# Altium PCB 2.0_X0.PcbDoc (part 1 of 2)
Units mm, origin at the board's own origin, x right, y up, seen from the top; angles counter-clockwise.
Board outline 35 x 45.39 mm, 4 copper layers (Top, Route2, Route15, Bottom), stack 1.64 mm thick; 99 components, 106 nets, 391 pads, 199 vias.
Unrouted connection lines stored in the file: 53.
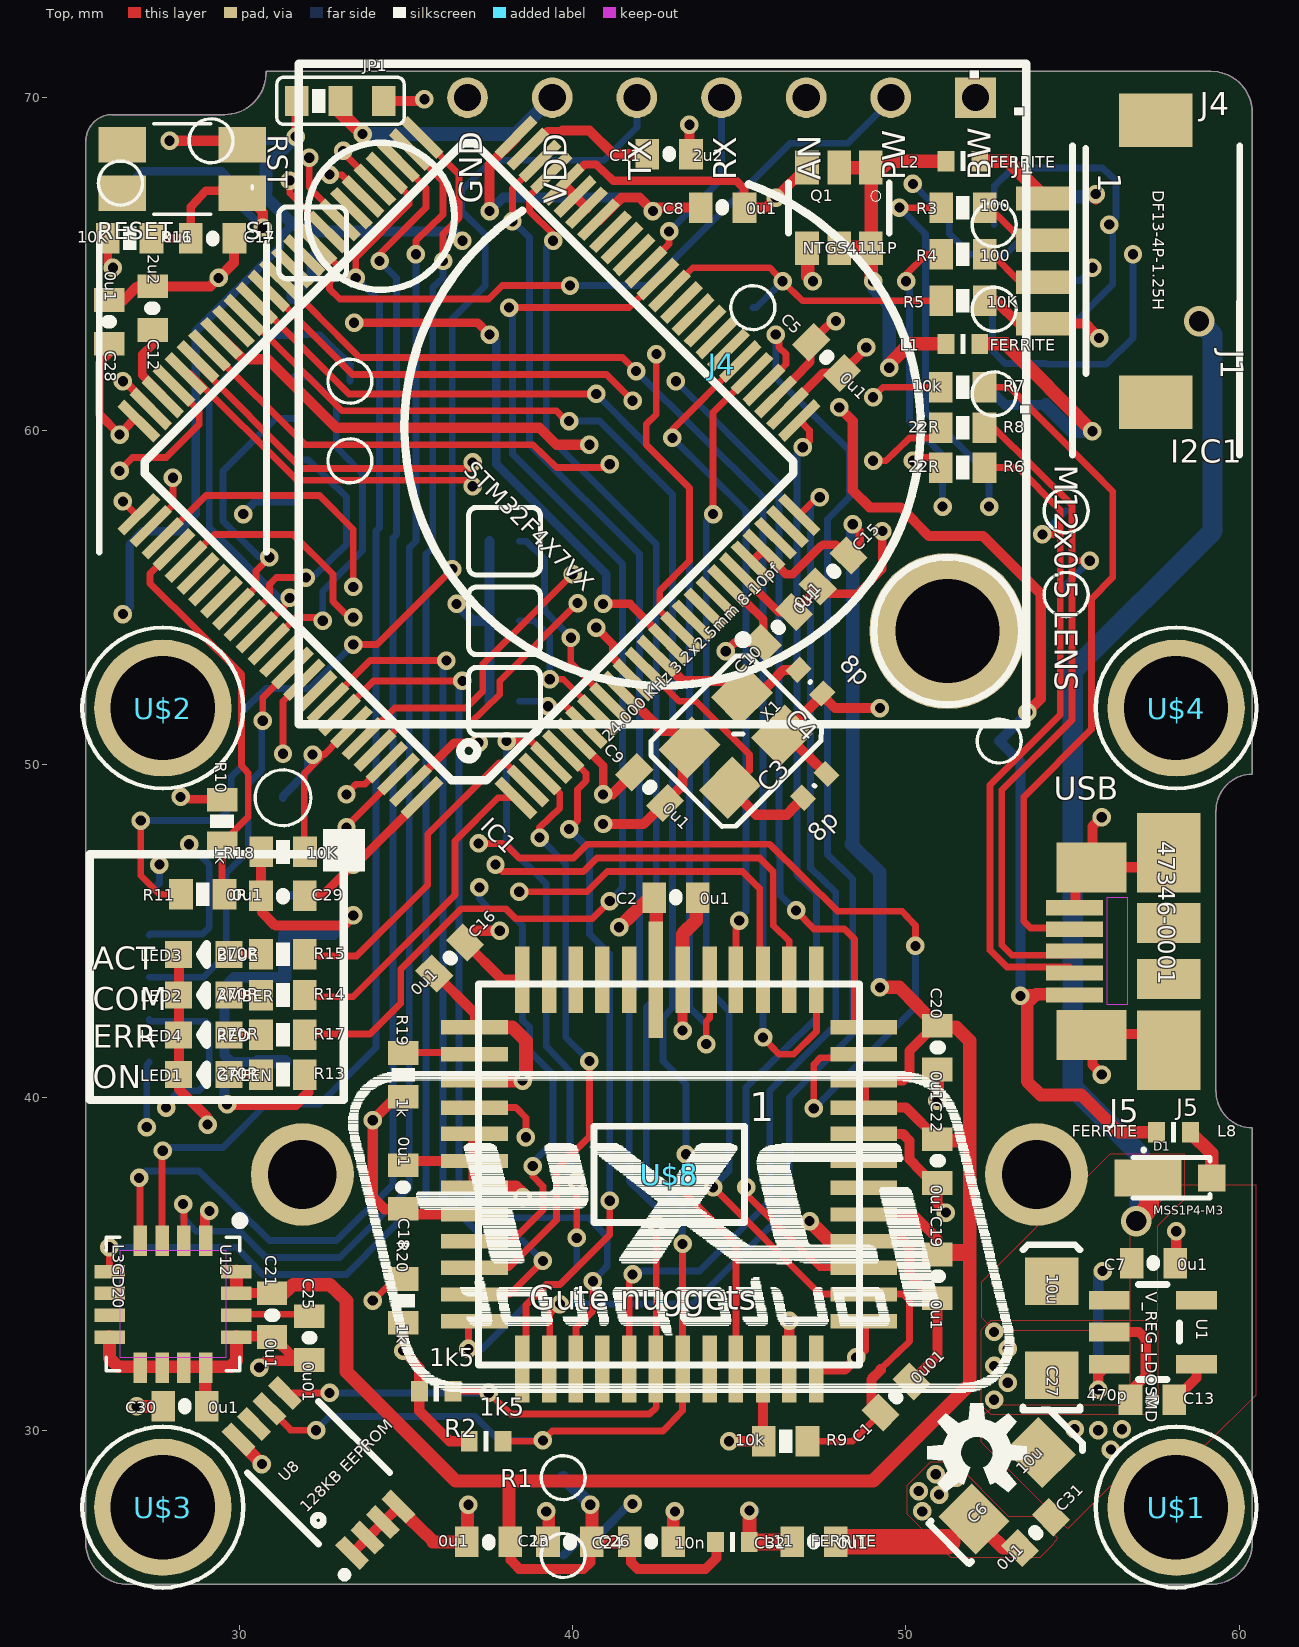
[diagram p0: Top view]
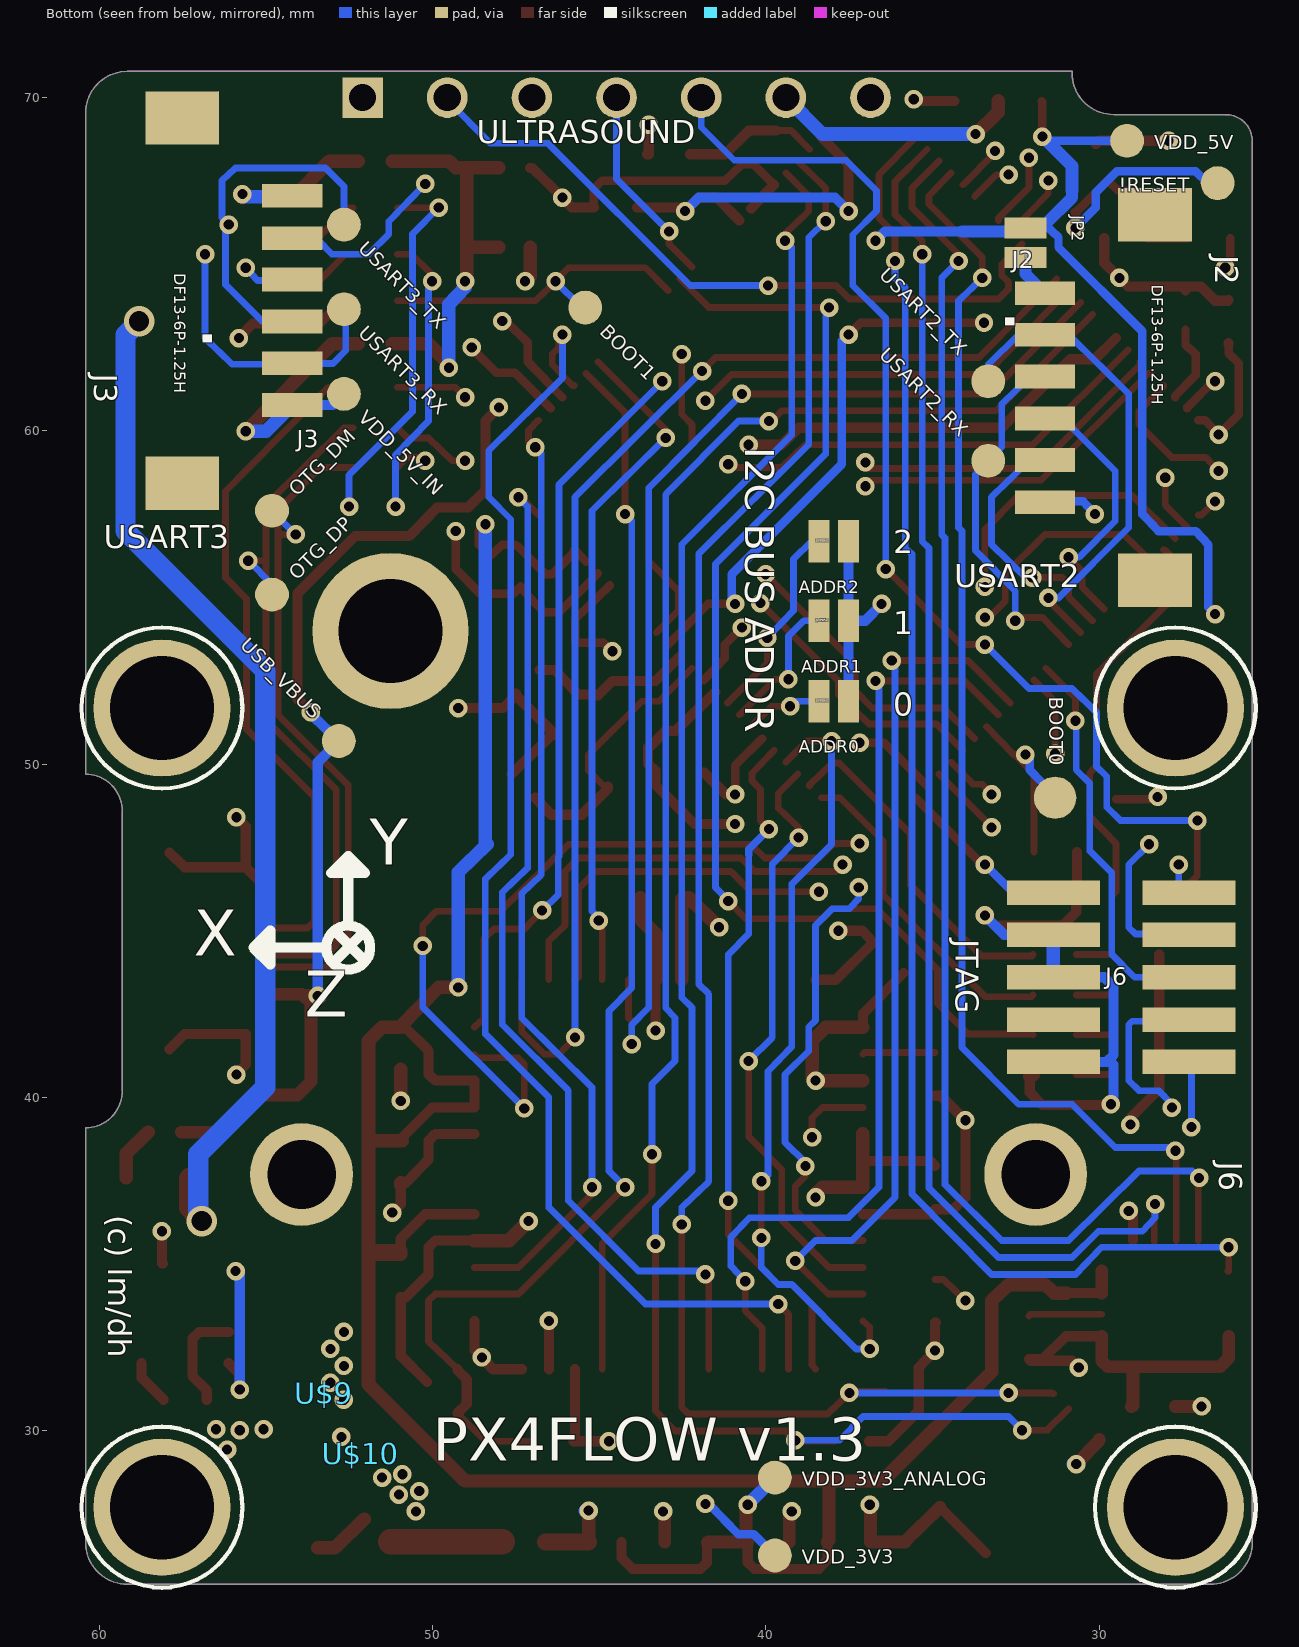
[diagram p1: Bottom view, seen from below]
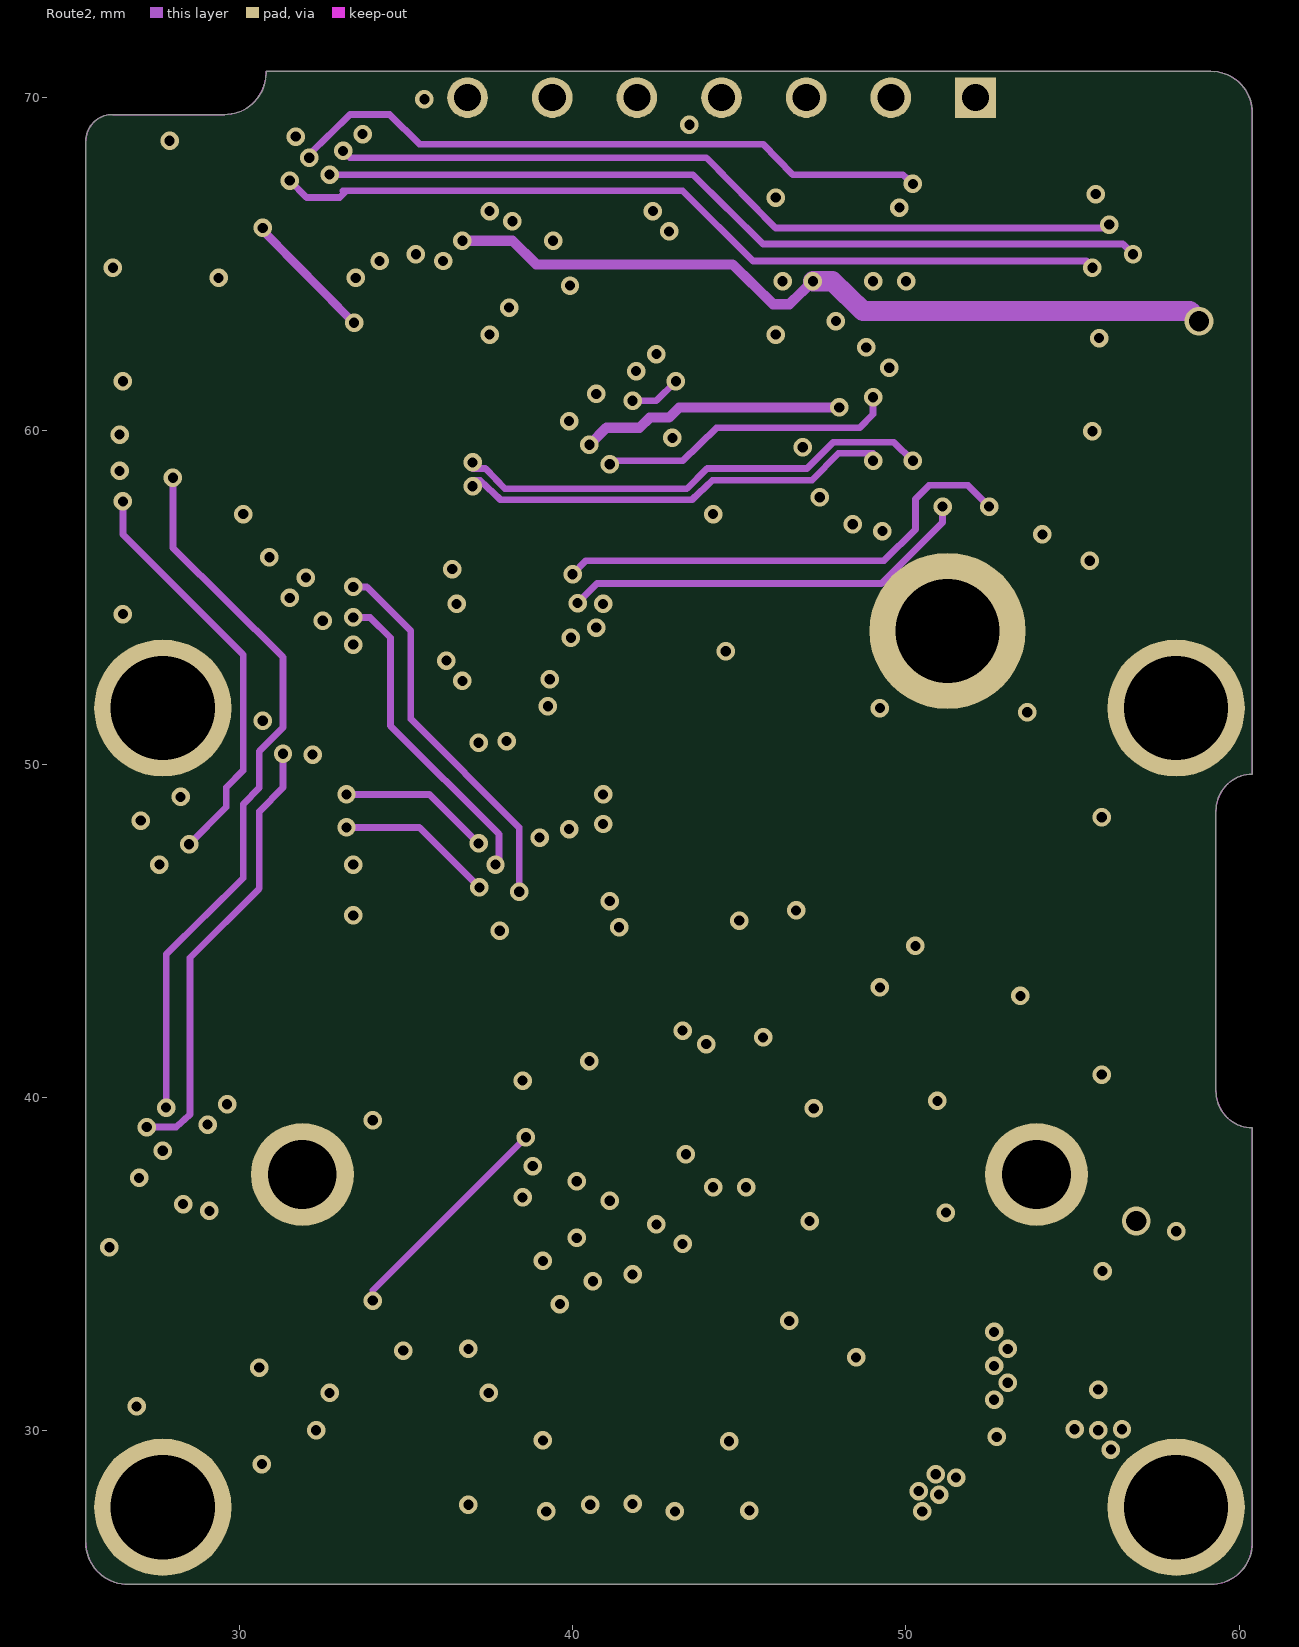
[diagram p2: Route2]
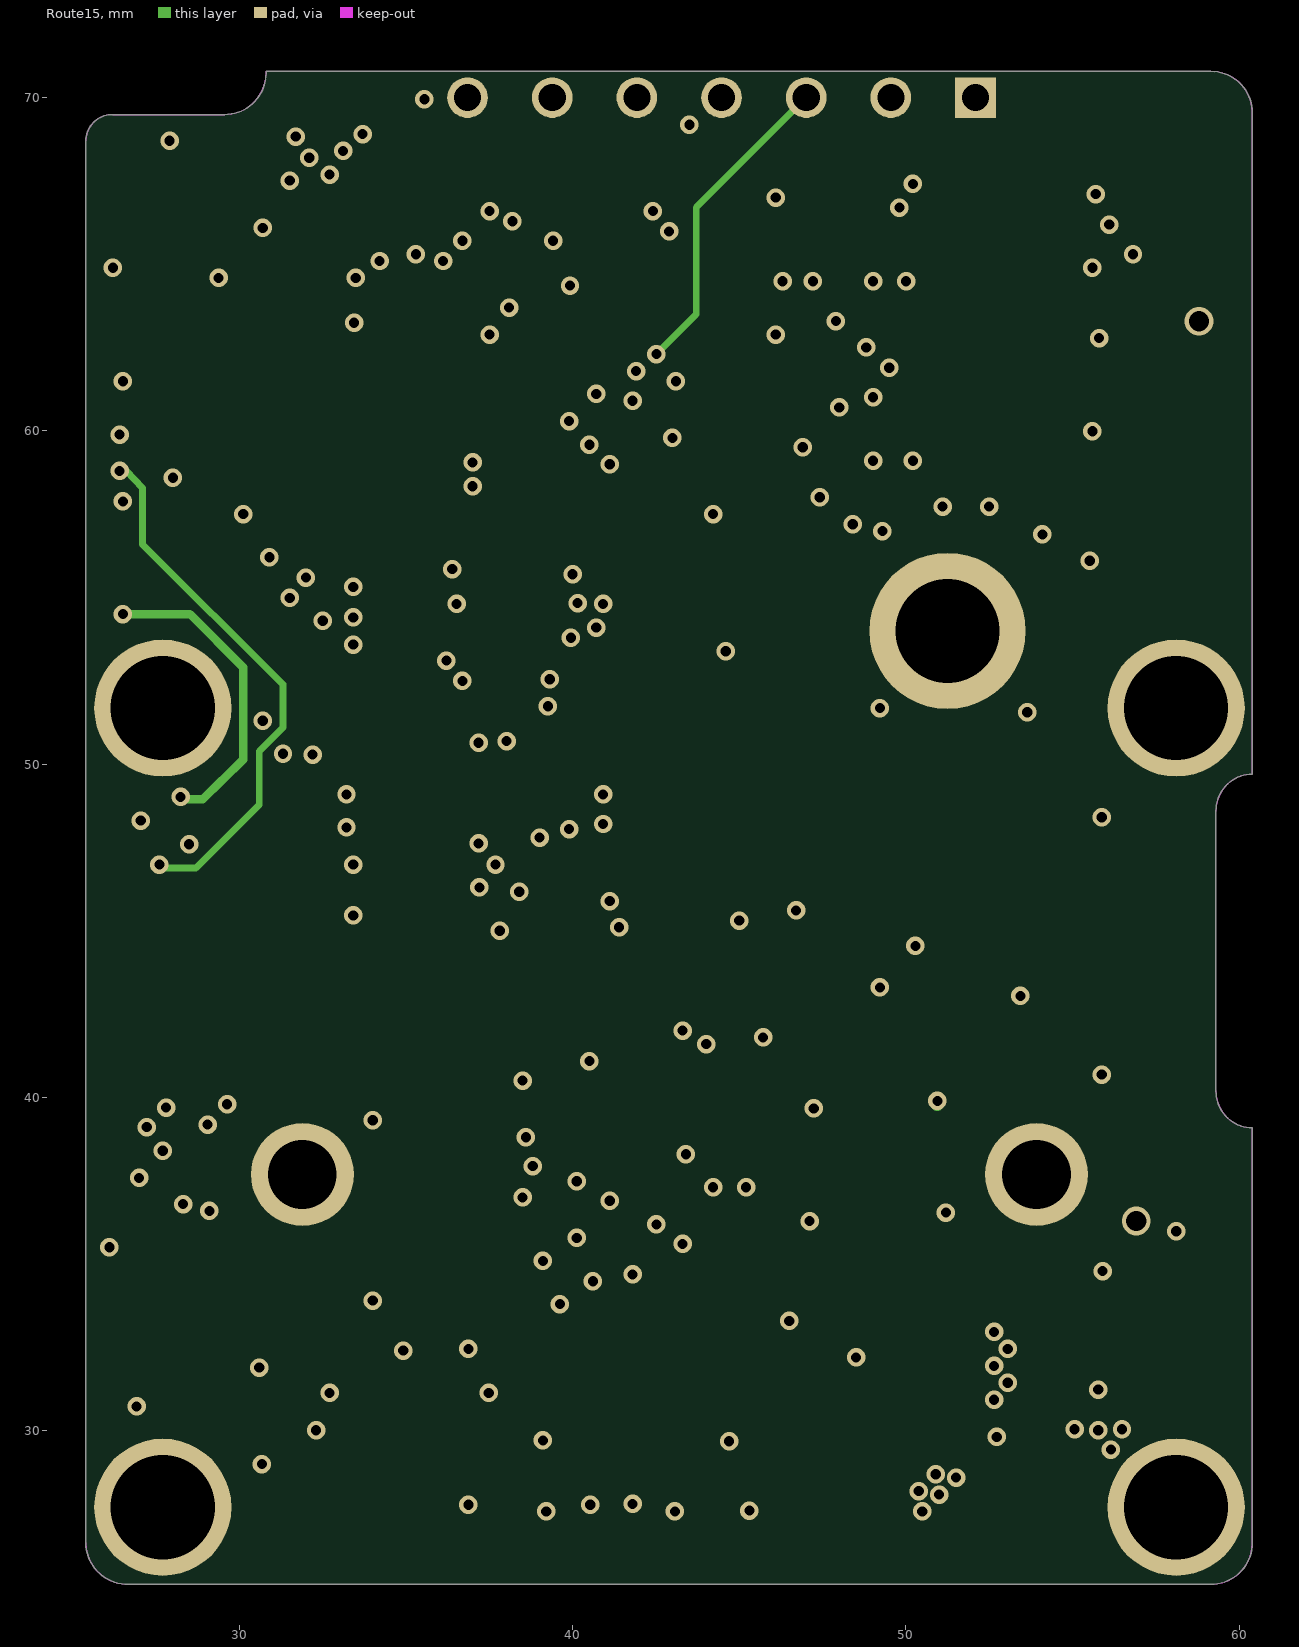
[diagram p3: Route15]

## Layer stack, top to bottom
Top Solder: solder mask 0.0102, Solder Resist, Dk 3.5
Top: signal copper 0.035
Dielectric 1: core 0.5, FR-4, Dk 4.8
Route2: signal copper 0.035
Dielectric 2: core 0.5, FR-4, Dk 4.8
Route15: signal copper 0.035
Dielectric 3: core 0.5, FR-4, Dk 4.8
Bottom: signal copper 0.035
Bottom Solder: solder mask 0.0102, Solder Resist, Dk 3.5

## Board outline
25.4,26.645 25.4,68.707 cw(c26.2,68.694) 26.213,69.494 29.566,69.494 ccw(c29.566,70.739) 30.81,70.739 30.81,70.79 59.157,70.79 cw(c59.157,69.545) 60.401,69.545 60.401,49.708 ccw(c60.414,48.603) 59.309,48.59 59.309,40.208 ccw(c60.414,40.195) 60.401,39.091 60.401,26.645 cw(c59.157,26.645) 59.157,25.4 26.67,25.4 cw(c26.657,26.657)

## Design rules (kind name [scope] priority, off if disabled: settings)
Clearance [All] p1: gap=0.15 except(0: SMDPad-SMDPad SMDPad-THPad SMDPad-Via)
Clearance "Clearance (Same Net)" [All] p2: gap=0 except(0.15: SMDPad-SMDPad SMDPad-THPad SMDPad-Via)
HoleSize HoleSize_1 [All] p1: absolutevalues=TRUE maxlimit=2540 minlimit=0.3 maxpercent=80.000 minpercent=20.000
HoleSize [All] p2: absolutevalues=TRUE maxlimit=2.54 minlimit=0.025 maxpercent=80.000 minpercent=20.000
HoleToHoleClearance mdViaViaSameLayer [All] p1: gap=0.203 allowstackedmicrovias=TRUE
HoleToHoleClearance [All] p2: gap=0.254 allowstackedmicrovias=TRUE
PasteMaskExpansion mlMinCreamFrame [All] p1: expansion=-0.102
PasteMaskExpansion [All] p2: expansion=0
PolygonConnect ThermalVias [IsVia] p1: connectstyle=Direct reliefconductorwidth=0.254 reliefentries=4 polygonreliefangle="90 Angle" airgapwidth=0.254
PolygonConnect [All] p2: connectstyle=Relief reliefconductorwidth=0.254 reliefentries=4 polygonreliefangle="90 Angle" airgapwidth=0.254
RoutingVias [All] p1: holewidth=0.711 width=1.27 viastyle="Through Hole" minholewidth=0.711 minwidth=1.27 maxholewidth=0.711 maxwidth=1.27
SilkToSilkClearance [All] p1 off: silktosilkclearance=0.254
SilkToSolderMaskClearance [IsPad] p1 off: minsilkscreentomaskgap=0.254 clearancetoexposedcopper=TRUE
SolderMaskExpansion mlMinStopFrame [All] p1: expansion=0.025
SolderMaskExpansion [All] p2: expansion=0.102
Width Width_1 [All] p1: maxlimit=2540 minlimit=0.15 preferedwidth=0.254
Width [All] p2: maxlimit=0.254 minlimit=0.254 preferedwidth=0.254
25 further rules are at their usual default settings.

## Components (designator, comment, footprint, x,y, rotation, side; value= is the part's Value field where it differs from the comment)
!RESET "" PAD.04X.04 26.441,67.437 r359.99 bottom
ADDR0 "JUMPER-2" SJ_2 38.405,51.892 r359.99 bottom
ADDR1 "JUMPER-2" SJ_2 38.405,54.305 r359.99 bottom
ADDR2 "JUMPER-2" SJ_2 38.405,56.693 r359.99 bottom
BOOT0 "" PAD.05X.05 31.318,48.997 r89.98 bottom
BOOT1 "" PAD.04X.04 45.415,63.703 r224.99 bottom
C1 "0u01" 0402-CAP#1 49.708,31.013 r45.01 top
C2 "0u1" 0402-CAP#1 43.104,45.999 r0 top
C3 "8p" 0402-CAP#2 47.269,49.352 r45.01 top
C4 "8p" 0402-CAP#2 47.142,52.476 r135 top
C5 "0u1" 0402-CAP#1 47.625,62.205 r315.01 top
C6 "10u" EIA3216 53.035,28.346 r45.01 top
C7 "0u1" 0402-CAP#1 57.429,35.027 r0 top
C8 "0u1" 0402-CAP#1 44.501,66.7 r0 top
C9 "0u1" 0402-CAP#1 42.316,49.301 r315.01 top
C10 "0u1" 0402-CAP#1 46.177,54.102 r45.01 top
C11 "2u2" 0402-CAP#1 42.901,68.301 r0 top
C12 "2u2" 0402-CAP#1 27.407,63.678 r90.02 top
C13 "470p" 0402-CAP#1 57.404,30.937 r180.01 top
C15 "0u1" 0402-CAP#1 47.828,55.804 r225.02 top
C16 "0u1" 0402-CAP#1 36.322,44.196 r225.02 top
C17 "0u1" 0402-CAP#1 29.21,65.786 r180.01 top
C18 "0u1" 0402-CAP#1 34.925,37.313 r90.02 top
C19 "0u1" 0402-CAP#1 50.952,34.646 r270 top
C20 "0u1" 0402-CAP#1 50.952,41.504 r270 top
C21 "0u1" 0402-CAP#1 30.988,33.477 r270 top
C22 "0u1" 0402-CAP#1 50.952,38.1 r270 top
C23 "0u1" 0402-CAP#1 37.49,26.67 r180.01 top
C24 "10n" 0402-CAP#1 42.367,26.67 r0 top
C25 "0u01" 0402-CAP#1 32.106,32.791 r270 top
C26 "1n" 0402-CAP#1 39.929,26.67 r180.01 top
C27 "10u" EIA3216 54.381,33.071 r90.02 top
C28 "0u1" 0402-CAP#1 26.111,63.271 r90.02 top
C29 "0u1" 0402-CAP#1 31.318,46.05 r180.01 top
C30 "0u1" 0402-CAP#1 28.372,30.734 r0 top
C31 "0u1" 0402-CAP#1 53.899,26.949 r225.02 top
C32 "0u1" 0402-CAP#1 47.244,26.67 r0 top
D1 "MSS1P4-M3" MICROSMP 58.522,37.592 r0 top
IC1 "STM32F4X7VX" TQFP100 36.906,58.903 r135 top
J1 "DF13-4P-1.25H" DF13A-4P-1.25H 57.506,65.1 r270 top
J2 "DF13-6P-1.25H" DF13A-6P-1.25H 28.321,61.011 r270 bottom
J3 "DF13-6P-1.25H" DF13A-6P-1.25H 57.506,63.906 r89.98 bottom
J4 "" MAXSONAR 52.095,70.002 r0 top
J5 "47346-0001" MOLEX-47346-0001 57.887,44.399 r180.01 top
J6 "" FTSH-105-01-XXX-DV-K 29.337,43.612 r270 bottom
JP1 "" SJ_3_0603_PASTE1&2 32.385,69.901 r0 top
JP2 "JUMPER-2" SJ_2 32.207,65.202 r270 bottom
L1 "FERRITE" 0402-IND 51.714,62.611 r0 top
L2 "FERRITE" 0402-IND 51.714,68.097 r0 top
L8 "FERRITE" 0402-IND 58.039,38.964 r180.01 top
L11 "FERRITE" 0402-IND 44.806,26.67 r180.01 top
LED1 "GREEN" LED-0603 28.931,40.691 r270 top
LED2 "AMBER" LED-0603 28.931,43.078 r270 top
LED3 "BLUE" LED-0603 28.931,44.298 r270 top
LED4 "RED" LED-0603 28.931,41.885 r270 top
OTG_DM "" PAD.04X.04 54.813,57.607 r134.99 bottom
OTG_DP "" PAD.04X.04 54.813,55.093 r134.99 bottom
Q1 "NTGS4111P" TSOP-6 48.006,66.7 r180.01 top
R1 "1k5" 0402-RES#1 37.414,29.693 r180.01 top
R2 "1k5" 0402-RES#1 35.916,31.191 r180.01 top
R3 "100" 0402-RES#2 51.714,66.7 r0 top
R4 "100" 0402-RES#2 51.714,65.303 r0 top
R5 "10K" 0402-RES#2 51.714,63.906 r0 top
R6 "22R" 0402-RES#2 51.714,58.903 r180.01 top
R7 "10k" 0402-RES#2 51.714,61.316 r180.01 top
R8 "22R" 0402-RES#2 51.714,60.096 r180.01 top
R9 "10k" 0402-RES#2 46.406,29.693 r180.01 top
R10 "1k" 0402-RES#2 29.489,48.285 r270 top
R11 "0R" 0402-RES#2 28.905,46.101 r0 top
R13 "270R" 0402-RES#2 31.318,40.691 r180.01 top
R14 "270R" 0402-RES#2 31.318,43.078 r180.01 top
R15 "270R" 0402-RES#2 31.318,44.298 r180.01 top
R16 "10K" 0402-RES#2 26.721,65.786 r180.01 top
R17 "270R" 0402-RES#2 31.318,41.885 r180.01 top
R18 "10K" 0402-RES#2 31.318,47.371 r0 top
R19 "1k" 0402-RES#2 34.925,40.691 r270 top
R20 "1k" 0402-RES#2 34.925,33.909 r270 top
S1 "RESET" EVQP7J01K 28.296,67.869 r180.01 top
U1 "V_REG_LDOSMD" SOT23-5 57.404,32.969 r270 top
U8 "128KB EEPROM" MSOP-8 32.385,28.727 r45.01 top
U12 "L3GD20" L3G4200DH-MAN 28.016,33.807 r270 top
U$1 "" MOUNT-HOLE3.1 58.115,27.711 r0 top
U$2 "" MOUNT-HOLE3.1 27.711,51.689 r0 top
U$3 "" MOUNT-HOLE3.1 27.711,27.711 r0 top
U$4 "" MOUNT-HOLE3.1 58.115,51.689 r0 top
U$5 "" CLCC-48 42.901,37.694 r0 top
U$8 "" LENSMOUNT_LARGE_M12 42.901,37.694 r0 top
U$9 "" PX4-LOGO-20MM 53.264,31.14 r180 bottom
U$10 "" OSHW-LOGO-S 52.146,29.337 r180 bottom
USART2_RX "" PAD.04X.04 33.325,59.106 r45 bottom
USART2_TX "" PAD.04X.04 33.325,61.493 r45 bottom
USART3_RX "" PAD.04X.04 52.654,63.652 r224.99 bottom
USART3_TX "" PAD.04X.04 52.654,66.192 r224.99 bottom
USB_VBUS "" PAD.04X.04 52.807,50.698 r45 bottom
VDD_3V3 "" PAD.04X.04 39.726,26.264 r180 bottom
VDD_3V3_ANALOG "" PAD.04X.04 39.726,28.6 r180 bottom
VDD_5V "" PAD.04X.04 29.159,68.707 r180 bottom
VDD_5V_IN "" PAD.04X.04 52.654,61.112 r224.99 bottom
X1 "24.000 KHz 3.2x2.5mm 8-10pf" OSCILLATOR-3.2X2.5 44.907,50.698 r225.02 top

## Footprints (in the part's own frame and the unit in brackets; to place one, negate y for a bottom-side part, rotate by r counter-clockwise, add the part's x,y. Pads: shape width x height; smd on the part's side, far side on the other; paste and mask are expansions set on the pad)
0402-CAP#1 [mil] "0402-CAP"
  rect 28x36 smd: 1(-25.59,0) 2(26,0)
  silkscreen extent 0,-1 0,2
0402-CAP#2 [mil] "0402-CAP"
  rect 20x24 smd: P$1(-19.69,0) P$2(20,0)
  silkscreen extent 0,0 0,1
0402-IND [mil] "0402-IND"
  rect 20x24 smd: P$1(-19.68,0) P$2(20,0)
  silkscreen extent -3,-12 3,12
0402-RES#1 [mil] "0402-RES"
  rect 20x24 smd: P$1(-19.69,0) P$2(20,0)
  silkscreen extent -3,-12 3,12
0402-RES#2 [mil] "0402-RES"
  rect 28x36 smd: 1(-25.59,0) 2(26,0)
  silkscreen extent -8,-14 8,14
CLCC-48 [mil] "CLCC-48"
  rect 17x138 smd: 1(-15.75,230)
  rect 17x79 smd: 2(-47.24,230) 3(-78.74,230) 4(-110.24,230) 5(-141.73,230) 6(-173.23,230) 19(-173.23,-229.92) 20(-141.73,-229.92) 21(-110.24,-229.92) 22(-78.74,-229.92) 23(-47.24,-229.92) 24(-15.75,-229.92) 25(16,-229.92) 26(48,-229.92) 27(79,-229.92) 28(111,-229.92) 29(142,-229.92) 30(174,-229.92) 43(174,230) 44(142,230) 45(111,230) 46(79,230) 47(48,230) 48(16,230)
  rect 79x17 smd: 7(-229.92,174) 8(-229.92,142) 9(-229.92,111) 10(-229.92,79) 11(-229.92,48) 12(-229.92,16) 13(-229.92,-15.75) 14(-229.92,-47.24) 15(-229.92,-78.74) 16(-229.92,-110.24) 17(-229.92,-141.73) 18(-229.92,-173.23) 31(230,-173.23) 32(230,-141.73) 33(230,-110.24) 34(230,-78.74) 35(230,-47.24) 36(230,-15.75) 37(230,16) 38(230,48) 39(230,79) 40(230,111) 41(230,142) 42(230,174)
  silkscreen extent -225,-225 225,225
DF13A-4P-1.25H [mil] "DF13A-4P-1.25H"
  rect 28x71 smd: 1(-73.82,-129.92) 2(-24.61,-129.92) 3(25,-129.92) 4(74,-129.92)
  rect 63x87 smd: S1(167,0) S2(-166.34,0)
  silkscreen extent -133,-83 133,99
DF13A-6P-1.25H [mil] "DF13A-6P-1.25H"
  rect 28x71 smd: 1(-123.03,-129.92) 2(-73.82,-129.92) 3(-24.61,-129.92) 4(25,-129.92) 5(74,-129.92) 6(124,-129.92)
  rect 63x87 smd: S1(216,0) S2(-215.55,0)
EIA3216 [mil] "EIA3216"
  rect 56x63 smd: A(56,0) C(-55.12,0)
  silkscreen extent -96,-33 99,34
EVQP7J01K [mil] "EVQP7J01K"
  rect 56x42 smd: A1(-70.87,29) A2(71,29) B3(-70.87,-28.54) B4(71,-28.54)
  silkscreen extent -83,-53 34,54
FTSH-105-01-XXX-DV-K [mil] "FTSH-105-01-XXX-DV-K"
  rect 29x110 smd: 1(-100,-80) 2(-100,80) 3(-50,-80) 4(-50,80) 5(0,-80) 6(0,80) 7(50,-80) 8(50,80) 9(100,-80) 10(100,80)
L3G4200DH-MAN [mil] "L3G4200DH-MAN"
  rect 36x16 smd: 1(-74.8,39) 2(-74.8,13) 3(-74.8,-12.8) 4(-74.8,-38.39) 9(75,-38.39) 10(75,-12.8) 11(75,13) 12(75,39)
  rect 16x36 smd: 5(-38.39,-74.8) 6(-12.8,-74.8) 7(13,-74.8) 8(39,-74.8) 13(39,75) 14(13,75) 15(-12.8,75) 16(-38.39,75)
  Top keep-out region: -62.99,-62.99 63,-62.99 63,63 -62.99,63
  silkscreen extent -102,-79 79,83
LED-0603 [mil] "LED-0603"
  rect 32x32 smd: A(0,-29.53) C(0,30)
  silkscreen extent -12,-4 12,4
LENSMOUNT_LARGE_M12 [mil] "LENSMOUNT_LARGE_M12"
  round 121.5 hole 81: P$1(-433.07,0) P$2(434,0)
MAXSONAR [mil] "MAXSONAR"
  round 48 hole 32: AN(-200,0) GND(-600,0) PW(-100,0) RX(-300,0) TX(-400,0) VDD(-500,0)
  rect 48x48 hole 32: BW(0,0)
  round 184.5 hole 123: P$1(-33.07,-629.92)
  silkscreen extent -799,-740 60,40
MICROSMP [mil] "MICROSMP"
  rect 32x32 smd: ANODE(26,0)
  rect 79x44 smd: CATHODE(-49.21,0)
  silkscreen extent -67,-24 24,35
MOLEX-47346-0001 [mil] "MOLEX-47346-0001"
  rect 67x18 smd: D+(111,0) D-(111,26) GND(111,-51.18) ID(111,-25.59) VBUS(111,52)
  rect 75x94 smd: GND1(0,117) GND4(0,-116.14)
  rect 83x59 smd: GND2(91,99) GND3(91,-98.43)
  rect 75x47 smd: GND5(0,-32.97) GND6(0,33)
  Top keep-out region: 48,-62.99 73,-62.99 73,63 48,63
MOUNT-HOLE3.1 [mil] "MOUNT-HOLE3.1"
  round 162 hole 123: P$1(0,0)
  silkscreen extent -95,-95 95,95
MSOP-8 [mil] "MSOP-8"
  rect 16x41 smd: 1(-38.39,-94.49) 2(-12.8,-94.49) 3(13,-94.49) 4(39,-94.49) 5(39,95) 6(13,95) 7(-12.8,95) 8(-38.39,95)
  silkscreen extent -67,-110 60,60
OSCILLATOR-3.2X2.5 [mil] "OSCILLATOR-3.2X2.5"
  rect 56x48 smd: 1(-43.31,-33.46) 2(44,-33.46) 3(44,34) 4(-43.31,34)
  silkscreen extent -95,-83 83,71
OSHW-LOGO-S [mm] "OSHW-LOGO-S"
PAD.04X.04 [mil] "PAD.04X.04"
  rrect100% 40x40 smd: P$1(0,0)
PAD.05X.05 [mm] "PAD.05X.05"
  rrect100% 1.27x1.27 smd: P$1(0,0)
PX4-LOGO-20MM [mm] "PX4-LOGO-20MM"
SJ_2 [mil] "SJ_2"
  rect 25x50 smd: 1(-35,0) 2(0,0)
SJ_3_0603_PASTE1&2 [mil] "SJ_3_0603_PASTE1&2"
  rect 28x36 smd: 1(-25.59,0) 2(26,0) 3(77,0)
  silkscreen extent -49,-28 101,28
SOT23-5 [mil] "SOT23-5"
  rect 22x48 smd: 1(-37.4,-51.18) 2(0,-51.19) 3(38,-51.19) 4(38,52) 5(-37.4,52)
  silkscreen extent -56,-17 56,32
TQFP100 [mil] "TQFP100"
  rect 60x12 smd: 1(-314.96,237) 2(-314.96,217) 3(-314.96,197) 4(-314.96,178) 5(-314.96,158) 6(-314.96,138) 7(-314.96,119) 8(-314.96,99) 9(-314.96,79) 10(-314.96,60) 11(-314.96,40) 12(-314.96,20) 13(-314.96,0) 14(-314.96,-19.69) 15(-314.96,-39.37) 16(-314.96,-59.06) 17(-314.96,-78.74) 18(-314.96,-98.43) 19(-314.96,-118.11) 20(-314.96,-137.8) 21(-314.96,-157.48) 22(-314.96,-177.17) 23(-314.96,-196.85) 24(-314.96,-216.54) 25(-314.96,-236.22) 51(315,-236.22) 52(315,-216.54) 53(315,-196.85) 54(315,-177.17) 55(315,-157.48) 56(315,-137.8) 57(315,-118.11) 58(315,-98.43) 59(315,-78.74) 60(315,-59.06) 61(315,-39.37) 62(315,-19.68) 63(315,0) 64(315,20) 65(315,40) 66(315,60) 67(315,79) 68(315,99) 69(315,119) 70(315,138) 71(315,158) 72(315,178) 73(315,197) 74(315,217) 75(315,237)
  rect 12x60 smd: 26(-236.22,-314.96) 27(-216.54,-314.96) 28(-196.85,-314.96) 29(-177.17,-314.96) 30(-157.48,-314.96) 31(-137.8,-314.96) 32(-118.11,-314.96) 33(-98.43,-314.96) 34(-78.74,-314.96) 35(-59.06,-314.96) 36(-39.37,-314.96) 37(-19.68,-314.96) 38(0,-314.96) 39(20,-314.96) 40(40,-314.96) 41(60,-314.96) 42(79,-314.96) 43(99,-314.96) 44(119,-314.96) 45(138,-314.96) 46(158,-314.96) 47(178,-314.96) 48(197,-314.96) 49(217,-314.96) 50(237,-314.96) 76(237,315) 77(217,315) 78(197,315) 79(178,315) 80(158,315) 81(138,315) 82(119,315) 83(99,315) 84(79,315) 85(60,315) 86(40,315) 87(20,315) 88(0,315) 89(-19.69,315) 90(-39.37,315) 91(-59.06,315) 92(-78.74,315) 93(-98.43,315) 94(-118.11,315) 95(-137.8,315) 96(-157.48,315) 97(-177.17,315) 98(-196.85,315) 99(-216.54,315) 100(-236.22,315)
  silkscreen extent -276,-276 276,276
TSOP-6 [mil] "TSOP-6"
  rect 28x40 smd: 1(-37.4,-47.24) 2(0,-47.24) 3(38,-47.24) 4(38,48) 5(0,48) 6(-37.4,48)
  silkscreen extent -59,-30 60,30

## Part data
!RESET BOOT1 OTG_DM OTG_DP USART2_RX USART2_TX USART3_RX USART3_TX USB_VBUS VDD_3V3 VDD_3V3_ANALOG VDD_5V VDD_5V_IN: library part PAD.04X.04
ADDR0 ADDR1 ADDR2 JP2: library part SJ_2
BOOT0: library part PAD.05X.05
C1 C2 C3 C4 C5 C7 C8 C9 C10 C11 C12 C13 C15 C16 C17 C18 C19 C20 C21 C22 C23 C24 C25 C26 C28 C29 C30 C31 C32: library part 0402-CAP
C6 C27: library part EIA3216
D1: library part MICROSMP
IC1: library part TQFP100
J1: library part DF13A-4P-1.25H
J2 J3: library part DF13A-6P-1.25H
J4: library part MAXSONAR
J5: library part MOLEX-47346-0001
J6: library part FTSH-105-01-XXX-DV-K
JP1: library part SJ_3_0603_PASTE1&2
L1 L2 L8 L11: library part 0402-IND
LED1 LED2 LED3 LED4: library part LED-0603
Q1: library part TSOP-6
R1 R2 R3 R4 R5 R6 R7 R8 R9 R10 R11 R13 R14 R15 R16 R17 R18 R19 R20: library part 0402-RES
S1: library part EVQP7J01K
U1: library part SOT23-5
U8: library part MSOP-8
U12: library part L3G4200DH-MAN
U$1 U$2 U$3 U$4: library part MOUNT-HOLE3.1
U$5: library part CLCC-48
U$8: library part LENSMOUNT_LARGE_M12
U$9: library part PX4-LOGO-20MM
U$10: library part OSHW-LOGO-S
X1: library part OSCILLATOR-3.2X2.5

## Via types
v1: diameter 0.555/0.555/0.555/0.555 (per signal layer), hole 0.305, Top to Bottom, 197 vias
v2: diameter 0.914/0.86/0.86/0.914 (per signal layer), hole 0.61, Top to Bottom, 2 vias

## Nets (pads, with @x,y where several pads share a name; then routed paths per layer and width w, separated by ;. In a path a pad name is that pad's centre, name@x,y a point inside that pad or via, vN(x,y) a via of type N, cw(c..) or ccw(c..) an arc to the next point about the centre after c; other vN are vias at no path point)
!JTRST: IC1.90 J6.10 | length 17.9
  Top w0.203: v1(31.318,50.317) 31.318,51.892 IC1.90@31.953,52.527
  Route2 w0.203: v1(27.229,39.116) 28.118,39.116 28.524,39.497 28.524,44.196 30.607,46.279 30.607,48.59 31.318,49.301 v1(31.318,50.317)
  Bottom w0.203: v1(27.229,39.116) 27.229,40.97 J6.10@27.305,41.072
!RESET: !RESET.P$1 C17.2 IC1.14 R16.1 S1.A1 | length 31.2
  Top w0.254: R16.1@27.356,65.786 C17.2@28.55,65.786 28.55,66.726 29.007,67.208 29.413,67.208 29.743,67.513 30.099,67.158 30.709,66.548 ; v1(33.452,63.246) 37.16,63.246 v1(37.516,62.89) ; v1(40.919,54.813) 41.732,54.813 IC1.14@42.926,53.594
  Top w0.305: v1(30.709,66.091) 30.709,66.548
  Route2 w0.254: v1(30.709,66.091) 30.709,66.015 v1(33.452,63.246)
  Bottom w0.254: !RESET.P$1@26.441,67.437 26.746,67.437 27.102,67.793 29.464,67.793 30.099,67.158 30.099,66.7 v1(30.709,66.091) ; v1(37.516,62.89) 37.719,62.713 37.719,59.004 41.021,55.702 41.021,54.889 v1(40.919,54.813)
ADC12_IN4: IC1.33
ADC12_IN5: IC1.34
ADC123_IN10: IC1.15 J4.AN | length 19.2
  Top w0.203: v1(42.52,62.306) 42.52,60.503 42.215,60.198 42.215,59.588 43.51,58.293 43.51,56.109 42.621,55.194 42.621,54.61 IC1.15@43.282,53.95
  Route15 w0.203: v1(42.52,62.306) 43.713,63.5 43.713,66.7 J4.AN@47.015,70.002
ADC123_IN11: IC1.16
ADC123_IN12: IC1.17
ADC123_IN13: IC1.18
ADDR0: ADDR0.2 IC1.7 | length 2.3
  Top w0.203: v1(39.268,51.74) 39.827,51.74 IC1.7@40.437,51.13
  Bottom w0.203: ADDR0.2@38.405,51.892 39.116,51.892 v1(39.268,51.74)
ADDR1: ADDR1.2 IC1.8 | length 4.7
  Top w0.203: IC1.8@40.792,51.486 39.726,52.553 ; 39.726,52.553 v1(39.319,52.553) 39.726,52.553
  Bottom w0.203: ADDR1.2@38.405,54.305 38.862,54.305 39.319,53.848 v1(39.319,52.553)
ADDR2: ADDR2.2 IC1.9 | length 6.1
  Top w0.203: v1(39.954,53.797) 39.954,53.035 IC1.9@41.148,51.841
  Bottom w0.203: ADDR2.2@38.405,56.693 38.608,56.693 39.167,56.159 39.167,54.61 v1(39.954,53.797)
BOOT0: BOOT0.P$1 IC1.94 R18.2 | length 6.5
  Top w0.203: R18.2@31.953,47.371 31.953,49.708 32.436,50.19 32.334,50.19 v1(32.207,50.292) 32.563,50.292 IC1.94@33.376,51.13
  Bottom w0.254: BOOT0.P$1@31.318,48.997 31.318,49.047 32.08,49.835 32.08,50.165 v1(32.207,50.292)
CAM_NRESET: C1.1 IC1.30 R9.1 U$5.32 | length 39.3
  Top w0.203: v1(44.221,37.313) 47.422,34.112 48.743,34.112 49.911,34.112 50.114,33.909 50.114,32.69 49.251,31.852 ; v1(44.221,57.506) 44.221,60.554 IC1.30@45.39,61.722 ; R9.1@47.066,29.693 48.412,29.693 C1.1@49.251,30.531
  Top w0.305: C1.1@49.251,30.531 48.971,30.81 48.971,31.547 49.251,31.826 49.251,31.852
  Bottom w0.203: v1(44.221,37.313) 44.704,37.795 44.704,42.494 44.704,42.596 44.018,43.307 44.018,57.302 v1(44.221,57.506)
CAN1_RX: IC1.81
CAN1_TX: IC1.82
DCMI_D0: IC1.63 U$5.43 | length 37
  Top w0.203: IC1.63@31.267,64.567 33.503,62.306 33.604,62.205 41.504,62.205 v1(41.91,61.798) ; v1(45.72,41.808) 46.203,41.3 46.634,41.3 47.32,41.986 U$5.43@47.32,43.536
  Bottom w0.203: v1(41.91,61.798) 45.72,58.014 v1(45.72,41.808)
DCMI_D1: IC1.64 U$5.42 | length 36.1
  Top w0.203: IC1.64@30.912,64.211 32.614,62.509 33.401,61.697 41.021,61.697 v1(41.808,60.909) ; v1(46.711,45.618) 47.244,45.06 48.158,45.06 48.463,44.755 48.463,42.367 U$5.42@48.743,42.113
  Route2 w0.203: v1(41.808,60.909) 42.52,60.909 v1(43.104,61.493)
  Bottom w0.203: v1(43.104,61.493) 46.203,58.395 46.203,47.244 46.228,47.193 46.228,46.076 v1(46.711,45.618)
DCMI_D2: IC1.97 U$5.41 | length 30.4
  Top w0.203: v1(33.223,49.098) 33.503,49.403 33.782,49.403 IC1.97@34.442,50.063 ; v1(37.186,47.625) 37.897,47.625 37.897,47.6 37.998,47.6 38.405,47.193 40.03,47.193 40.437,47.6 45.923,47.6 47.955,45.593 49.886,45.593 50.292,45.161 v1(50.292,44.552) ; v1(47.244,39.675) 47.244,40.996 47.447,41.199 48.666,41.199 U$5.41@48.743,41.3
  Route2 w0.203: v1(33.223,49.098) 35.712,49.098 v1(37.186,47.625)
  Bottom w0.203: v1(47.244,39.675) 50.292,42.723 v1(50.292,44.552)
DCMI_D3: IC1.98 U$5.15 | length 20.7
  Top w0.203: v1(33.223,48.108) 33.223,48.133 IC1.98@34.798,49.708 ; U$5.15@37.084,35.712 38.202,35.712 39.116,36.627 39.116,37.338 38.811,37.643 v1(38.811,37.948)
  Route2 w0.203: v1(33.223,48.108) 35.408,48.108 v1(37.211,46.304)
  Bottom w0.203: v1(37.211,46.304) 37.211,45.974 37.49,45.669 37.998,45.669 38.506,45.161 38.506,42.316 38.71,42.113 38.71,41.402 39.421,40.691 39.421,38.659 38.811,38.049 v1(38.811,37.948)
DCMI_D4: IC1.3 U$5.16 | length 17.9
  Top w0.203: U$5.16@37.084,34.9 38.1,34.9 39.522,36.322 39.522,37.846 40.513,38.837 v1(40.513,41.097) ; v1(39.014,47.803) 39.014,48.108 39.624,48.692 39.624,49.124 IC1.3@39.04,49.708
  Bottom w0.203: v1(39.014,47.803) 39.802,47.015 39.802,41.808 v1(40.513,41.097)
DCMI_D5: IC1.92 U$5.17 | length 26.5
  Top w0.203: IC1.92@32.664,51.841 33.934,53.111 v1(36.22,53.111) ; U$5.17@37.084,34.112 38.125,34.112 v1(39.116,35.103)
  Bottom w0.203: v1(36.22,53.111) 36.119,53.01 36.119,37.008 37.414,35.712 38.506,35.712 v1(39.116,35.103)
DCMI_D6: IC1.4 U$5.18 | length 23.5
  Top w0.203: v1(36.881,32.461) 36.881,33.122 U$5.18@37.084,33.299 ; v1(38.024,50.698) 38.76,50.698 IC1.4@39.395,50.063 ; v1(40.132,35.789) v1(40.132,37.49)
  Bottom w0.203: v1(36.881,32.461) 37.287,32.461 39.218,34.392 39.624,34.392 40.132,34.9 v1(40.132,35.789) ; v1(38.024,50.698) 38.024,47.6 39.218,46.406 39.218,41.529 39.929,40.792 39.929,37.668 v1(40.132,37.49)
DCMI_D7: IC1.5 U$5.19 | length 20.9
  Top w0.203: U$5.19@38.506,31.852 38.608,31.979 38.608,33.782 39.218,34.392 39.624,34.392 41.123,35.89 v1(41.123,36.906) ; IC1.5@39.751,50.419 40.411,49.733 40.411,49.505 40.157,49.251 40.157,48.311 40.107,48.26 v1(39.903,48.057)
  Bottom w0.203: 40.513,47.295 40.513,44.907 41.123,44.298 v1(41.123,36.906)
  Bottom w0.229: v1(39.903,48.057) 40.513,47.447 40.513,47.295
DCMI_D8: IC1.78 U$5.45 | length 30.3
  Top w0.203: IC1.78@27.711,56.769 29.007,58.064 32.41,58.064 33.426,57.048 v1(33.426,55.321) ; v1(38.405,46.177) 40.437,46.177 41.046,46.787 45.11,46.787 45.618,46.279 45.618,43.612 U$5.45@45.72,43.536
  Route2 w0.203: v1(33.426,55.321) 33.833,55.321 35.154,54 35.154,51.359 38.405,48.108 v1(38.405,46.177)
DCMI_D9: IC1.80 U$5.44 | length 28.8
  Top w0.203: IC1.80@28.423,56.083 29.261,56.896 31.623,56.896 32.817,55.702 32.817,54.889 33.299,54.407 v1(33.426,54.407) ; v1(37.694,46.99) 37.897,46.787 40.335,46.787 40.742,47.193 45.618,47.193 46.025,46.787 46.025,45.161 46.507,44.704 U$5.44@46.507,43.536
  Route2 w0.203: v1(33.426,54.407) 33.934,54.407 34.544,53.797 34.544,51.156 37.795,47.904 37.795,46.888 v1(37.694,46.99)
DCMI_D10: IC1.91
DCMI_D11_UART5_RX: IC1.83
DCMI_HSYNC: IC1.29 U$5.20 | length 40.6
  Top w0.203: U$5.20@39.319,31.852 39.319,33.503 v1(39.624,33.807) ; IC1.29@45.745,61.366 45.796,61.366 46.406,62.001 46.406,62.306 46.203,62.509 46.203,62.789 v1(46.101,62.89)
  Bottom w0.203: v1(39.624,33.807) 43.612,33.807 46.507,36.703 46.507,40.005 48.412,41.91 48.412,46.558 47.65,47.295 47.65,57.353 48.311,58.014 48.311,59.411 46.101,61.595 v1(46.101,62.89)
DCMI_PIXCK: IC1.31 U$5.46 | length 20.7
  Top w0.203: U$5.46@44.907,43.536 44.907,45.212 v1(45.009,45.314) ; IC1.31@45.034,62.078 v1@43.002,60.046 ; v1@43.002,60.046 v1(43.002,59.792) v1@43.002,60.046
  Bottom w0.203: v1(43.002,59.792) 45.212,57.607 45.212,45.593 45.009,45.39 v1(45.009,45.314)
DCMI_VSYNC: IC1.93 U$5.21 | length 28.8
  Top w0.203: IC1.93@33.02,51.486 34.036,52.502 v1(36.703,52.502) ; U$5.21@40.107,31.852 40.107,33.096 40.615,33.604 v1(40.615,34.493)
  Bottom w0.203: v1(36.703,52.502) 36.601,52.4 36.601,37.313 37.516,36.398 40.488,36.398 41.046,35.814 41.046,34.95 v1(40.615,34.493)
GND: ADDR0.1 ADDR1.1 ADDR2.1 C1.2 C2.2 C3.P$2 C4.P$1 C5.2 C6.C C7.2 C8.2 C9.2 C10.2 C11.2 C12.2 C13.2 C15.2 C16.2 C17.1 C18.2 C19.2 C20.2 C21.2 C22.2 C23.2 C24.2 C25.2 C26.2 C27.C C28.2 C29.2 C30.2 C31.2 C32.2 IC1.10 IC1.20 IC1.27 IC1.44 IC1.45 IC1.46 IC1.74 IC1.99 J1.4 J2.6 J3.6 J4.GND J5.GND J5.GND1 J5.GND2 J5.GND3 J5.GND4 J6.3 J6.5 J6.9 Q1.3 R5.2 R13.1 R18.1 S1.B3 U1.2 U8.1 U8.2 U8.3 U8.4 U12.8 U12.9 U12.10 U12.11 U12.12 U12.13 U$5.7 U$5.9 U$5.11 U$5.12 U$5.13 U$5.29 U$5.34 U$5.38 U$5.48 X1.2 X1.4 | length 145.2
  Top w0.254: v1(26.518,61.493) 26.518,61.544 27.356,60.706 IC1.74@27.356,60.681 ; IC1.99@35.154,49.352 36.449,50.648 v1(37.186,50.648) ; IC1.46@39.751,67.386 40.361,67.996 40.716,67.996 41.224,67.513 44.907,67.513 45.161,67.259 C8.2@45.161,66.7 ; IC1.20@45.034,55.728 46.203,54.559 46.634,54.559 47.346,55.27 47.346,55.347 47.574,55.118 48.565,55.118 49.301,55.855 v1(49.301,56.998) v1@49.276,56.998 ; IC1.27@46.457,60.681 47.523,61.747 48.082,61.747 48.819,62.484 v1(48.819,62.509)
  Top w0.305: C28.2@26.111,63.932 26.137,63.906 26.518,63.906 26.949,64.338 C12.2@27.406,64.338 ; C12.2@27.407,64.313 27.407,64.211 C12.2@27.406,64.338 ; v1(27.915,68.707) 29.997,68.707 S1.B3@30.099,68.605 ; v1(29.642,39.802) 29.642,39.776 31.699,39.776 32.08,40.157 R13.1@32.08,40.64 ; C17.1@29.845,65.786 29.845,65.049 v1(29.388,64.592) 29.134,64.338 C12.2@27.406,64.338 ; U12.13@29.921,32.842 30.988,32.842 31.699,32.156 32.106,32.156 32.055,32.106 30.81,32.106 v1(30.607,31.902) ; v1(30.124,57.506) v1@30.201,57.506 ; R18.1@30.658,47.371 C29.2@30.658,46.05 30.683,46.025 30.683,45.568 31.09,45.161 33.122,45.161 v1(33.426,45.466) ; U8.1@33.401,26.34 33.858,26.797 34.315,27.254 U8.4@34.773,27.711 ; C18.2@34.925,37.948 35.052,38.1 U$5.12@37.084,38.1 ; C16.2@35.865,43.739 37.084,42.52 U$5.7@37.084,42.113 ; IC1.46@39.751,67.386 40.107,67.031 IC1.44@40.437,66.675 ; v1(40.919,48.209) 42.139,48.209 42.774,48.844 43.307,49.378 43.307,49.809 43.536,50.013 43.536,50.521 43.485,50.521 43.002,51.003 42.697,51.003 IC1.10@41.504,52.172 ; v1(43.307,42.012) U$5.48@43.307,43.536 ; v1(43.51,69.19) 43.51,68.301 C11.2@43.561,68.301 ; C8.2@45.161,66.7 45.822,66.7 v1(46.101,67.005) 47.015,67.894 Q1.3@47.066,67.894 ; U$5.29@46.507,31.852 v1(46.507,33.299) ; C4.P$1@47.498,52.121 C4.P$1@47.498,52.07 ; C3.P$2@47.625,49.708 46.431,50.876 46.304,50.876 C4.P$1@47.498,52.07 ; U$5.34@48.743,35.712 49.911,35.712 50.114,35.509 50.114,34.696 50.8,34.011 50.952,34.011 50.952,32.258 C1.2@50.165,31.471 ; U$5.38@48.743,38.913 49.911,38.913 50.114,38.71 50.114,38.151 50.8,37.44 C22.2@50.952,37.44 ; v1(49.225,51.689) 47.879,51.689 C4.P$1@47.498,52.07 ; C22.2@50.952,37.389 50.952,36.805 v1(51.206,36.551) ; R5.2@52.375,63.906 52.705,63.906 53.416,63.195 54.178,63.195 54.204,63.221 55.397,63.221 v1(55.804,62.789) ; J5.GND@55.093,45.695 55.093,46.406 J5.GND3@55.601,46.914 ; v1(55.88,40.691) 55.601,40.996 55.601,41.91 57.429,41.91 J5.GND1@57.887,41.453 ; v1(55.88,48.412) 55.601,48.133 J5.GND3@55.601,46.914 ; U1.2@56.109,32.969 56.998,32.969 57.201,32.766 57.201,31.648 56.769,31.217 C13.2@56.769,30.937 ; J5.GND4@57.887,47.346 57.429,46.914 J5.GND3@55.601,46.914 ; C7.2@58.09,35.027 58.115,35.027 v1(58.115,35.992)
  Top w0.381: U12.8@26.111,32.842 26.111,32.182 26.365,31.928 27.026,31.928 27.686,31.928 28.346,31.928 U12.12@28.981,31.928 ; C30.2@29.032,30.734 28.981,30.759 U12.12@28.981,31.928 ; U12.13@29.921,32.842 29.921,32.106 29.743,31.928 U12.12@28.981,31.928 ; U8.4@34.773,27.711 35.814,26.695 35.814,26.67 36.855,26.67 36.855,27.762 v1(36.881,27.788) ; v1(39.218,27.584) 39.294,27.534 C26.2@39.294,26.67 ; C24.2@43.028,26.67 43.028,27.534 v1(43.078,27.584)
  Top w0.406: R13.1@31.979,40.691 32.029,40.64 R13.1@32.08,40.64 ; U$5.11@37.084,38.913 37.084,38.1 37.084,37.313 38.303,37.313 38.506,37.109 v1(38.506,37.008) ; U$5.9@37.084,40.513 v1(38.506,40.513) 38.608,40.589 38.608,41.707 38.202,42.113 U$5.7@37.084,42.113 ; U$5.48@43.307,43.536 43.307,44.907 43.713,45.314 43.713,45.949 C2.2@43.764,45.999 ; v1(47.117,36.297) 47.701,35.712 U$5.34@48.743,35.712 ; C22.2@50.952,37.389 C22.2@50.952,37.44 ; v1(50.952,39.903) C20.2@50.952,40.843 ; C6.C@52.045,27.356 52.934,26.492 C31.2@53.442,26.492 ; v1@55.702,67.005 v1(55.702,67.107)
  Top w0.762: C32.2@47.904,26.67 51.257,26.67
  Route15 w0.305: v1(36.525,54.813) v1@36.525,54.889
  Route15 w0.406: v1@50.952,39.802 v1(50.952,39.903)
  Bottom w0.254: v1(26.518,61.493) v1@26.518,61.595 ; v1(30.124,57.506) 30.48,57.887 J2.6@31.623,57.887
  Bottom w0.305: v1(29.642,39.802) 29.566,39.853 29.566,40.996 29.642,41.072 29.769,41.072 ; v1@30.607,31.801 v1(30.607,31.902) ; J6.9@31.369,41.072 29.769,41.072 ; J6.5@31.369,43.612 29.845,43.612 29.566,43.332 29.566,41.275 29.769,41.072 ; J6.3@31.369,44.882 32.842,44.882 v1(33.426,45.466) ; v1(36.525,54.813) 37.008,54.305 ADDR1.1@37.516,54.305 ; ADDR0.1@37.516,51.892 ADDR1.1@37.516,54.305 ; ADDR2.1@37.516,56.693 ADDR1.1@37.516,54.305
  Bottom w0.381: v1@36.779,27.788 v1(36.881,27.788)
  Bottom w0.406: J6.9@30.582,41.072 J6.9@31.369,41.072 ; J6.5@31.369,43.612 J6.3@31.369,44.882 ; J3.6@54.204,67.031 55.626,67.031 v1(55.702,67.107)
  other v1: 50.495,27.584 51.003,28.092 50.394,28.194 51.511,28.6 50.902,28.702 52.654,30.937 53.061,31.445 52.654,31.953 53.061,32.461 52.654,32.969
I2C1_SCL: IC1.95 R3.1 | length 34.5
  Top w0.203: IC1.95@33.731,50.775 34.671,51.689 36.805,51.689 37.313,52.197 37.313,53.01 v1(40.005,55.702) ; v1(49.809,66.7) R3.1@51.054,66.7
  Route2 w0.203: v1(40.005,55.702) 40.411,56.109 49.352,56.109 50.292,57.048 50.292,57.963 50.698,58.369 51.867,58.369 v1(52.502,57.734)
  Bottom w0.203: v1(49.809,66.7) 50.597,65.913 50.597,60.579 52.502,58.674 v1(52.502,57.734)
I2C1_SCL_EXT: J1.2 R3.2 | length 2.2
  Top w0.203: R3.2@52.375,66.7 52.502,66.7 53.518,65.71 54.178,65.71 J1.2@54.204,65.735
I2C1_SDA: IC1.96 R4.1 | length 29.3
  Top w0.203: IC1.96@34.087,50.419 34.874,51.206 36.906,51.206 37.821,52.095 37.821,52.502 v1(40.157,54.839) ; v1(50.013,64.491) 50.013,64.694 50.622,65.303 R4.1@51.054,65.303
  Route2 w0.203: v1(40.157,54.839) 40.742,55.423 40.869,55.423 49.276,55.423 51.105,57.252 v1(51.105,57.734)
  Bottom w0.203: v1(50.013,64.491) 50.114,64.414 50.114,60.3 51.105,59.284 v1(51.105,57.734)